# Altium PCB PCB_AD.pcbdoc
Units mil, origin at the board's own origin, x right, y up, seen from the top; angles counter-clockwise.
Board outline 1850 x 1525 mil, 2 copper layers (Top Layer, Bottom Layer); 13 components, 30 nets, 73 pads, 13 vias.
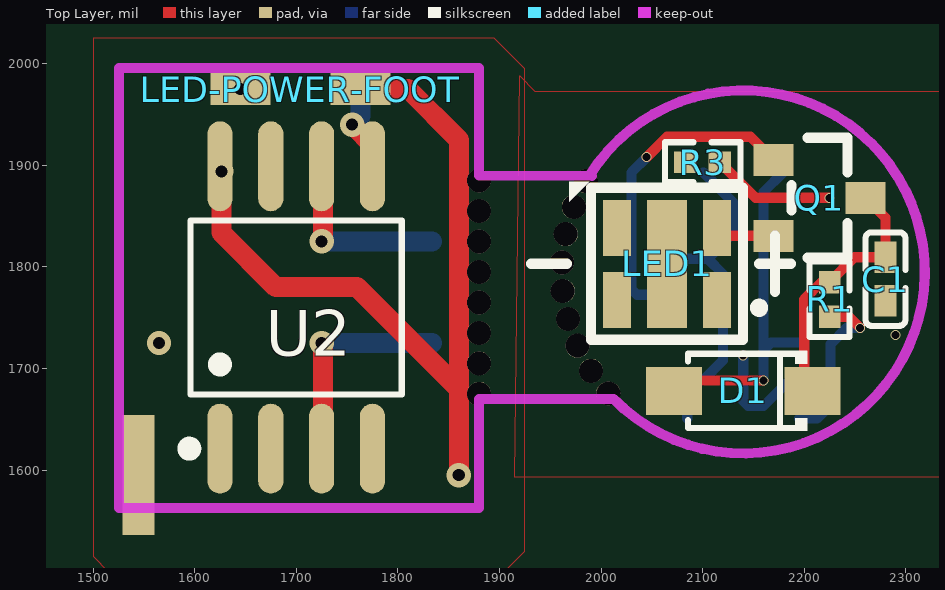
[diagram p0: Top Layer view]
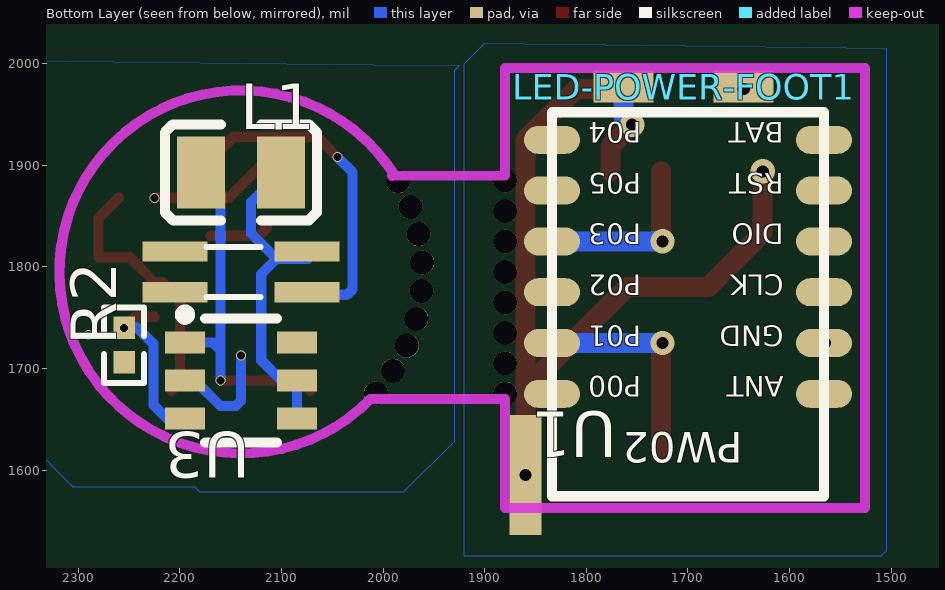
[diagram p1: Bottom Layer view, seen from below]

## Layer stack, top to bottom
Top Layer: signal copper (thickness not stored)
Dielectric: dielectric 12.6, FR-4, Dk 4.8
Bottom Layer: signal copper (thickness not stored)

## Board outline
2850,1000 1000,1000 1000,2525 2850,2525

## Components (designator, comment, footprint, x,y, rotation, side; value= is the part's Value field where it differs from the comment)
C1 "22u" C0402 2280,1787.96 r90 top
D1 "MBR0540" SOD-123FL_L2.7-W1.8-LS3.8-RD 2140,1677.96 r180 top
L1 "4.7uH" L0806 2140,1892.96 r0 bottom
LED1 "F.35.00041" LED-SMD_5P-L3.5-W3.5_UVC-UVA 2065,1802.96 r180 top
LED-POWER-FOOT "_" ?#1 1963.29,2022.73 r0 top
LED-POWER-FOOT1 "_" ?#2 1445,2025 r0 bottom
Q1 "SI2309" SOT-23_L2.9-W1.3-P1.90-LS2.4-BR 2215,1867.96 r180 top
R1 "73.2K" R0402#1 2225,1767.96 r90 top
R2 "10K" R0402#2 2255,1722.96 r270 bottom
R3 "100R" R0402#1 2100,1902.96 r180 top
U1 "PW02" PW02 1700,1800 r180 bottom
U2 "ATTINY85-20SU" SOIC-8_L5.3-W5.3-P1.27-LS8.0-BL 1700,1760 r0 top
U3 "SX1308" SOT-23-6_L2.9-W1.6-P0.95-LS2.8-BR 2140,1687.96 r180 bottom

## Footprints (in the part's own frame and the unit in brackets; to place one, negate y for a bottom-side part, rotate by r counter-clockwise, add the part's x,y. Pads: shape width x height; smd on the part's side, far side on the other; paste and mask are expansions set on the pad)
C0402 [mm]
  rect 0.79x0.54 smd: 1(-0.545,0) 2(0.545,0)
  silkscreen extent -1.17,-0.5 1.17,0.5
L0806 [mm]
  rect 1.2x1.8 smd: 1(1,0) 2(-1,0)
  silkscreen extent -1.9,-1.2 1.9,1.2
LED-SMD_5P-L3.5-W3.5_UVC-UVA [mm]
  rect 0.7x1.4 smd: 1(-1.25,0.9) 2(1.25,0.9) 3(-1.25,-0.9) 4(1.25,-0.9)
  rect 1x3.2 smd: 5(0,0)
  silkscreen extent -3.1,-2.05 3.4,1.9
PW02 [mm]
  oval 1.4x0.7 smd: 1(3.4,-3.175) 2(3.4,-1.905) 3(3.4,-0.635) 4(3.4,0.635) 5(3.4,1.905) 6(3.4,3.175) 7(-3.4,3.175) 8(-3.4,1.905) 9(-3.4,0.635) 10(-3.4,-0.635) 11(-3.4,-1.905) 12(-3.4,-3.175)
  Top Layer pour cut-out: 3.81,-6.096 -3.81,-6.096 -3.81,-3.683 3.81,-3.683
  Bottom Layer pour cut-out: 3.81,-6.096 3.81,-3.683 -3.81,-3.683 -3.81,-6.096
  silkscreen extent -3.4,-5.73 3.4,3.87
R0402#1 [mm]
  rect 0.566x0.54 smd: 1(-0.433,0) 2(0.433,0)
  silkscreen extent -0.94,-0.5 0.94,0.5
R0402#2 [mm]
  rect 0.566x0.54 smd: 1(0.433,0) 2(-0.433,0)
  silkscreen extent -0.94,-0.5 0.94,0.5
SOD-123FL_L2.7-W1.8-LS3.8-RD [mm]
  rect 1.4x1.2 smd: 1(-1.735,0) 2(1.735,0)
  silkscreen extent -1.6,-1 1.38,1
SOIC-8_L5.3-W5.3-P1.27-LS8.0-BL [mm]
  oval 0.63x2.25 smd: 1(-1.905,-3.53) 2(-0.635,-3.53) 3(0.635,-3.53) 4(1.905,-3.53) 5(1.905,3.53) 6(0.635,3.53) 7(-0.635,3.53) 8(-1.905,3.53)
  silkscreen extent -2.82,-3.68 2.64,2.18
SOT-23-6_L2.9-W1.6-P0.95-LS2.8-BR [mm]
  rect 1x0.55 smd: 1(-1.4,0.95) 2(-1.4,0) 3(-1.4,-0.95) 4(1.4,-0.95) 5(1.4,0) 6(1.4,0.95)
  silkscreen extent -1.52,-1.55 0.9,1.78
SOT-23_L2.9-W1.3-P1.90-LS2.4-BR [mm]
  rect 1x0.8 smd: 1(1.15,-0.95) 2(1.15,0.95) 3(-1.15,0)
  silkscreen extent -0.7,-1.5 0.7,1.5
?#1 [mm]
  rect 1.5x0.8 smd: 1(-8.084,-1.212) 1(-5.084,-1.212)
?#2 [mm]
  rect 1.5x0.8 smd: 1(5.084,1.212) 1(8.084,1.212)

## Free pads (board coordinates)
  rect 31.5x118.11 smd: 1(1545,1595)
  rect 31.5x118.11 smd far side: 1(1859.96,1595)
  rect 63.98x19.84 smd far side: 1(2205,1814.99) 2(2205,1775) 3(2075,1775) 4(2075,1814.99)
  round 23.62 hole 23.62 unplated: ""(1880,1675) ""(1880,1705) ""(1880,1735) ""(1880,1765) ""(1880,1795) ""(1880,1825) ""(1880,1855) ""(1880,1885) ""(1961.58,1804.35) ""(1962.32,1776.32) ""(1965.24,1832.14) ""(1967.43,1748.76) ""(1973.2,1859.02) ""(1976.79,1722.33) ""(1985.27,1884.33) ""(1990.16,1697.69) ""(2007.23,1675.45)

## Via types
v1: diameter 24, hole 12, Top Layer to Bottom Layer, tented both sides, 7 vias
v2: diameter 9.84, hole 7.87, Top Layer to Bottom Layer, tented both sides, 6 vias

## Nets (pads, with @x,y where several pads share a name; then routed paths per layer and width w, separated by ;. In a path a pad name is that pad's centre, name@x,y a point inside that pad or via, vN(x,y) a via of type N, cw(c..) or ccw(c..) an arc to the next point about the centre after c; other vN are vias at no path point)
3V: L1.2 pad.4 U3.4 U3.5 | length 325.5
  Bottom Layer w10: pad.4@2074.07,1807.99 pad.4@2105.03,1807.99 ; U3.4 U3.5 2100,1687.96 2120,1707.96 2120,1793.02 pad.4@2105.03,1807.99 ; L1.2 2130,1863.59 2130,1832.96 pad.4@2105.03,1807.99
3V3: LED-POWER-FOOT.1@1763.11,1975 pad.1@1859.96,1595 U1.6 U2.8 | length 890.2
  Top Layer w19.68: v1(1626.38,1893.98) 1626.4,1833.6 1680,1780 1760,1780 1860,1680 v1(1859.96,1595) 1860,1925 1810,1975 LED-POWER-FOOT.1@1763.1,1975
D1_1: C1.2 D1.1 Q1.3 R1.2 | length 257.3
  Top Layer w10: D1.1 2200,1686.27 2200,1767.96 2217.04,1785 R1.2 2249.42,1809.42 C1.2 2280,1848.23 Q1.3
EN: U1.9 U2.6 | length 178.4
  Top Layer w19.68: v1(1725,1825) 1726.38,1826.38 U2.6@1726.38,1893.98
  Bottom Layer w19.68: v1(1725,1825) U1.9@1833.85,1825
GND: C1.1 LED-POWER-FOOT1.1@1645.17,1977.27 LED-POWER-FOOT.1@1645,1975 pad.1@1545,1595 pad.1@2205,1814.99 pad.2 R2.1 R3.1 U1.2 U2.4 U3.2 | length 235
  Top Layer w10: R3.1 2152.04,1867.96 v2(2225,1867.96)
  Bottom Layer w10: v2(2140,1712.96) 2140,1667.96 2145,1662.96 2160,1662.96 2185,1687.96 U3.2
  other v1: 1565,1725 1645,1975
  other v2: 2290,1732.96
LED1_1: LED1.1
LED1_2: LED1.2
LED1_3: LED1.3 Q1.2 | length 58.8
  Top Layer w10: LED1.3 2122.04,1830.56 Q1.2
LED1_4: LED1.4
LED1_5: LED1.5
PWM: pad.3 Q1.1 | length 324.9
  Top Layer w10: v2(2045,1907.96) 2065,1927.96 2147.12,1927.96 Q1.1
  Bottom Layer w10: v2(2045,1907.96) 2030,1892.96 2030,1777.96 2035.41,1772.55 pad.3@2074.07,1772.55
R3_2: R3.2
RX0: U1.11 U2.3 | length 218.4
  Top Layer w19.68: v1(1725,1725) 1726.38,1723.62 U2.3@1726.38,1616.02
  Bottom Layer w19.68: v1(1725,1725) U1.11@1833.85,1725
S$1872: 
S$1874: 
TX1: U1.8
U1_1: D1.2 L1.1 U3.1 | length 373.7
  Top Layer w10: D1.2 2081.69,1687.96 v2(2160,1687.96)
  Bottom Layer w10: L1.1 2160,1873.59 v2(2160,1687.96) 2160,1717.96 2167.4,1725.36 U3.1
U1_3: R1.1 R2.2 U3.3 | length 166.6
  Top Layer w10: R1.1 2244.08,1750.92 v2(2255,1740)
  Bottom Layer w10: U3.3 2212.6,1650.56 2225.87,1663.83 2225.87,1723.83 2242.04,1740 v2(2255,1740)
U1_4: U1.4
U1_5: U1.5
U1_6: U3.6
U1_7: U1.7
U1_10: U1.10
U1_12: U1.12
U2_1: U2.1
U2_2: U2.2
U2_5: LED-POWER-FOOT1.1@1763.29,1977.27 U2.5 | length 95.6
  Top Layer w19.68: v1(1755,1940) 1776.38,1918.62 U2.5@1776.38,1893.98
  Bottom Layer w19.68: v1(1755,1940) 1763.29,1948.29 LED-POWER-FOOT1.1@1763.29,1977.27
U2_7: U2.7
U11_1: U1.1
U11_3: U1.3

## Polygon pours and split planes (outlines as drawn)
GND on Top Layer (solid): 1500,2025 1500,1515 1515,1500 1905,1500 1925,1520 1925,1995 1895,2025
GND on Top Layer (solid): 1920,1987.96 1935,1972.96 2350,1972.96 2350,1597.96 2345,1592.96 1915,1592.96
3V3 on Bottom Layer (solid): 1505,2015 1505,1520 1510,1515 1920,1515 1920,2000 1900,2020
GND on Bottom Layer (solid): 1925,1997.96 1930,1992.96 1930,1627.96 1980,1577.96 2180,1577.96 2185,1582.96 2305,1582.96 2350,1627.96 2350,2002.96

## Keep-outs
Keep-Out Layer:
  lines w10 net S$1874: 1989.22,1890.82 cw(c2140,1795) 2012.36,1670

## Silkscreen, mask and mechanical layers (free items; w line width, h text height)
Bottom Overlay:
  lines w6: 2120.77,1770.35 2174.03,1770.35 ; 2120.77,1819.65 2174.03,1819.65
Bottom Paste:
  region: 2104.07,1817.91 2044.06,1817.91 ccw(c2044.06,1815.92) 2042.07,1815.92 2042.07,1800.05 ccw(c2044.06,1800.05) 2044.06,1798.07 2104.07,1798.07 ccw(c2104.07,1800.05) 2106.05,1800.05 2106.05,1815.92 ccw(c2104.07,1815.92) 2104.07,1817.91
  region: 2104.07,1782.48 2044.06,1782.48 ccw(c2044.06,1780.49) 2042.07,1780.49 2042.07,1764.62 ccw(c2044.06,1764.62) 2044.06,1762.63 2104.07,1762.63 ccw(c2104.07,1764.62) 2106.05,1764.62 2106.05,1780.49 ccw(c2104.07,1780.49) 2104.07,1782.48
  region: 2244.81,1782.48 2184.8,1782.48 ccw(c2184.8,1780.49) 2182.82,1780.49 2182.82,1764.62 ccw(c2184.8,1764.62) 2184.8,1762.63 2244.81,1762.63 ccw(c2244.81,1764.62) 2246.8,1764.62 2246.8,1780.49 ccw(c2244.81,1780.49) 2244.81,1782.48
  region: 2244.81,1817.91 2184.8,1817.91 ccw(c2184.8,1815.92) 2182.82,1815.92 2182.82,1800.05 ccw(c2184.8,1800.05) 2184.8,1798.07 2244.81,1798.07 ccw(c2244.81,1800.05) 2246.8,1800.05 2246.8,1815.92 ccw(c2244.81,1815.92) 2244.81,1817.91

## Text inside footprints (layer, text, board x,y; h text height)
U1: Bottom Overlay "BAT" at 1605.82,1942.17 h20 r180; Bottom Overlay "RST" at 1605.82,1892.17 h20 r180; Bottom Overlay "CLK" at 1605.82,1792.17 h20 r180; Bottom Overlay "GND" at 1605.82,1742.17 h20 r180; Bottom Overlay "ANT" at 1605.82,1692.17 h20 r180; Bottom Overlay "P00" at 1745.82,1692.17 h20 r180; Bottom Overlay "P01" at 1745.82,1742.17 h20 r180; Bottom Overlay "P02" at 1745.82,1792.17 h20 r180; Bottom Overlay "P03" at 1745.82,1842.17 h20 r180; Bottom Overlay "P04" at 1745.82,1942.17 h20 r180; Bottom Overlay "P05" at 1745.82,1892.17 h20 r180; Bottom Overlay "DIO" at 1605.82,1842.17 h20 r180